# EAGLE board sensor_vi (EAGLE 5.06)
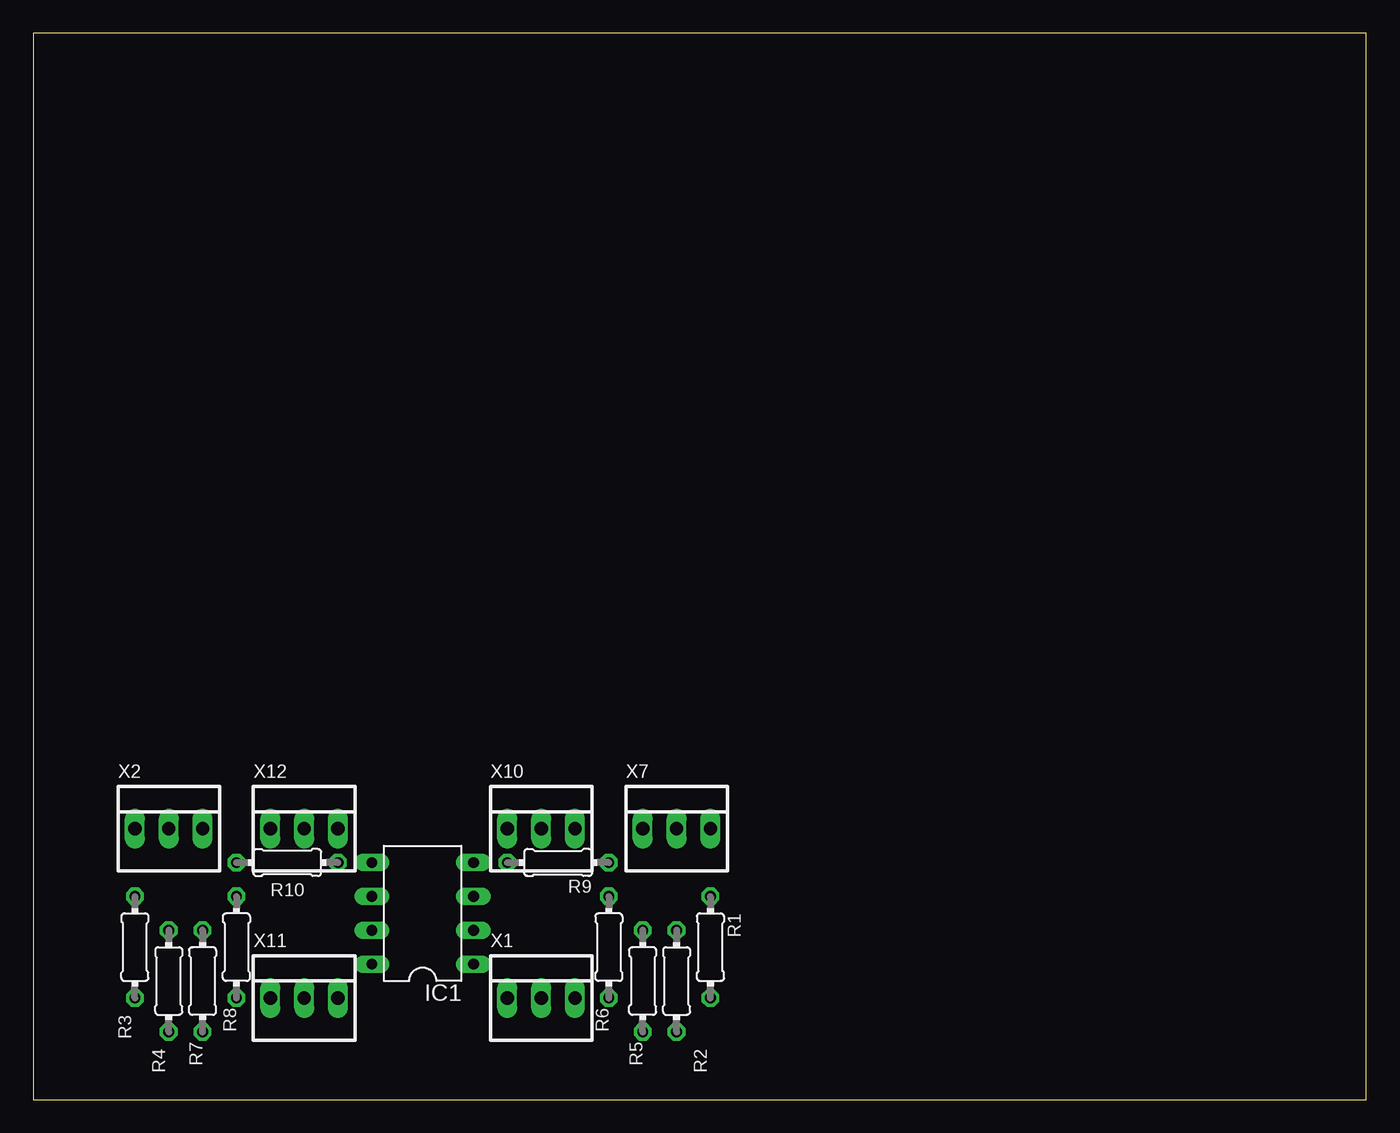
[diagram p0: board, top side]
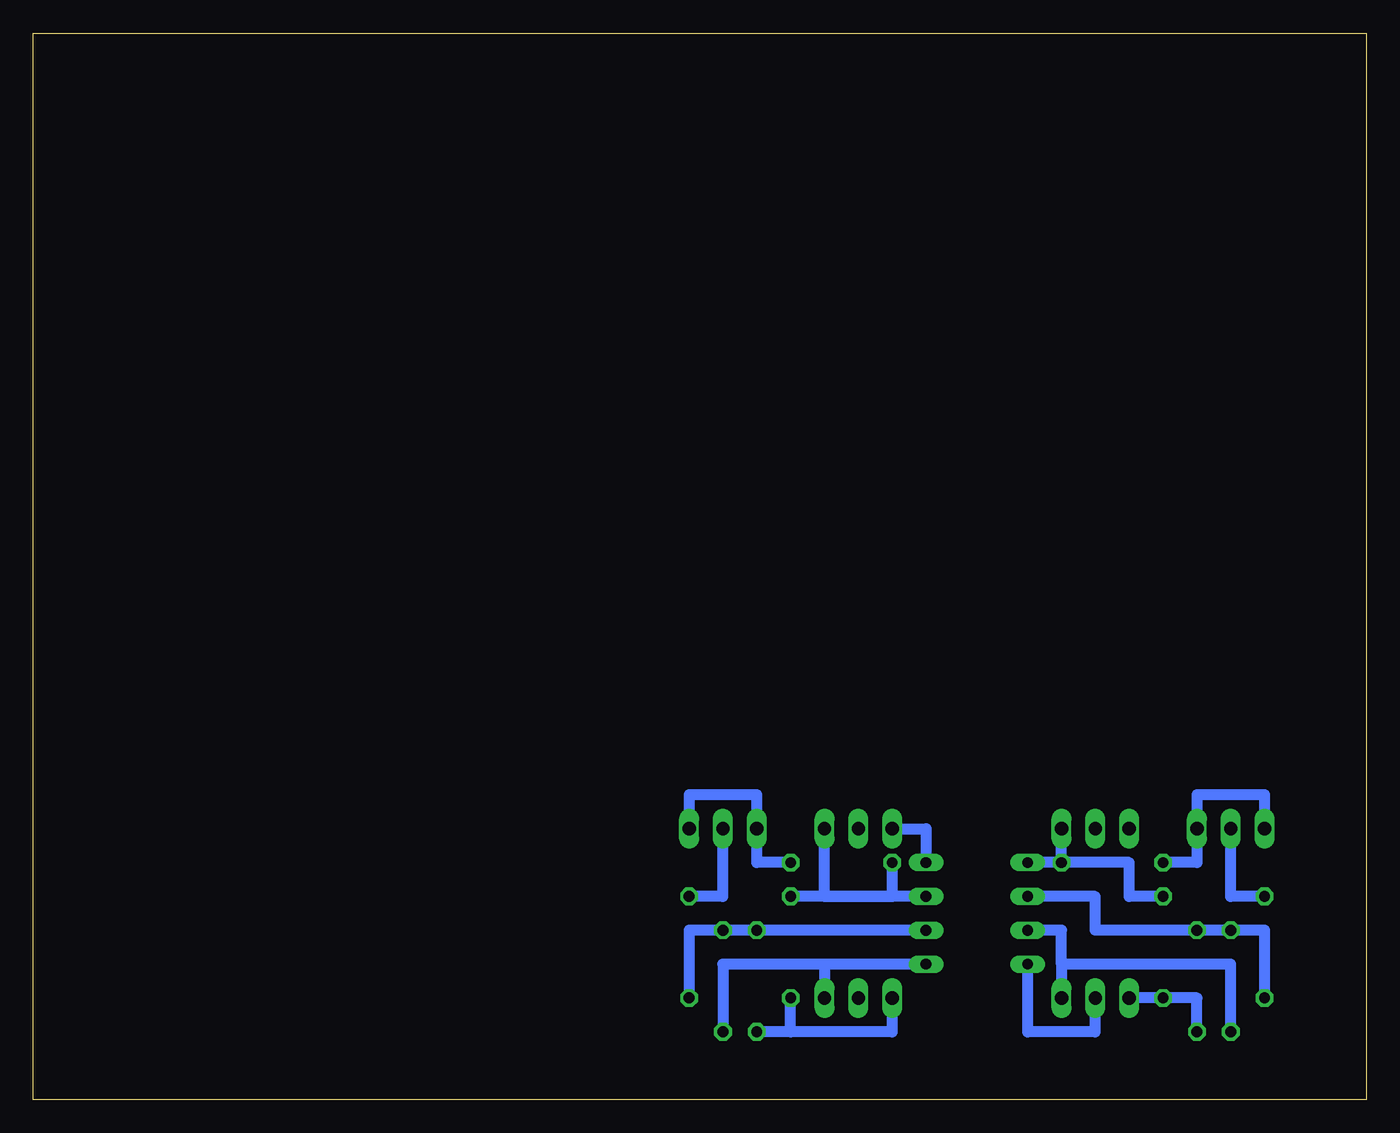
[diagram p1: board, bottom side, seen from below]

Size 100 x 80 mm. Coordinates in mm from the lower left corner, seen from the top.
Outline: 0,0 100,0 100,80 0,80 0,0
Copper layers (1*16): Top 0.035mm / dielectric 1.5mm / Bottom 0.035mm
Design rules "default": minimum track width 10mil, minimum drill 24mil, track to track 8mil, track to pad 8mil, pad to pad 8mil, via to via 8mil, smd to smd 8mil, copper to edge 40mil, drill to drill 8mil, minimum pad ring 10mil, minimum via ring 8mil, stop-mask expansion 4mil, vias tented up to drill 0mil, thermal gap 10mil

## Footprints (pad centres in the part's own frame; a part is rotated, then mirrored left to right if it is on the bottom)
DIL08 = drill 0.813 long: 1 -3.81,-3.81; 2 -1.27,-3.81; 3 1.27,-3.81; 4 3.81,-3.81; 5 3.81,3.81; 6 1.27,3.81; 7 -1.27,3.81; 8 -3.81,3.81
0204/7 = drill 0.813 octagon: 1 -3.81,0; 2 3.81,0
22-23-2031 = drill 1 long: 1 -2.54,0; 2 0,0; 3 2.54,0

## Placement (x,y rotation side)
IC1  LM358N  [DIL08]  29.21,13.97 90 top
R1  18K7  [0204/7]  50.8,11.43 270 top
R2  330K  [0204/7]  48.26,8.89 270 top
R3  33K  [0204/7]  7.62,11.43 270 top
R4  330K  [0204/7]  10.16,8.89 270 top
R5  5K6  [0204/7]  45.72,8.89 90 top
R6  5K6||330K  [0204/7]  43.18,11.43 90 top
R7  8K45  [0204/7]  12.7,8.89 90 top
R8  8K45||330K  [0204/7]  15.24,11.43 90 top
R9  18K7  [0204/7]  39.37,17.78 180 top
R10  33K  [0204/7]  19.05,17.78 0 top
X1  22-23-2031  [22-23-2031]  38.1,7.62 0 top
X2  22-23-2031  [22-23-2031]  10.16,20.32 0 top
X7  22-23-2031  [22-23-2031]  48.26,20.32 0 top
X10  22-23-2031  [22-23-2031]  38.1,20.32 0 top
X11  22-23-2031  [22-23-2031]  20.32,7.62 0 top
X12  22-23-2031  [22-23-2031]  20.32,20.32 0 top

## Library data of the parts
IC1 = linear
R1-R10 = rcl
X1 X2 X7 X10-X12 = con-molex

## Nets
GND: R7.1 R8.1 X11.1
N$1: IC1.2 R1.2 R2.1 R5.2
N$2: R9.1 X7.1 X7.3
N$3: IC1.1 R2.2 X1.3
N$4: IC1.3 R6.2 R9.2 X10.3
N$5: R1.1 X7.2
N$6: IC1.8 X11.2
N$7: IC1.7 R4.2 X11.3
N$8: IC1.6 R3.2 R4.1 R7.2
N$9: IC1.5 R8.2 R10.2 X12.3
N$10: R10.1 X2.1 X2.3
N$11: R3.1 X2.2
N$12: IC1.4 X10.1
N$14: R5.1 R6.1 X1.1

## Tracks (layer width: path | path; a pad name or v marks a point on that pad's centre or on a via)
GND
  Bottom 0.813: R7.1 12.7,7.62 R8.1 X11.1
N$1
  Bottom 0.813: IC1.2 R5.2 | R5.2 R2.1 | R2.1 50.8,12.7 R1.2 | R5.2 R2.1
N$2
  Bottom 0.813: X7.3 50.8,22.86 45.72,22.86 X7.1 45.72,17.78 R9.1
N$3
  Bottom 0.813: R2.2 48.26,10.16 40.64,10.16 | 40.64,10.16 X1.3 | IC1.1 40.64,10.16
N$4
  Bottom 0.813: IC1.3 40.64,15.24 | 40.64,15.24 R6.2 | 40.64,15.24 X10.3 | 40.64,15.24 35.56,15.24 R9.2
N$5
  Bottom 0.813: X7.2 48.26,15.24 R1.1
N$6
  Bottom 0.813: X11.2 20.32,5.08 25.4,5.08 IC1.8
N$7
  Bottom 0.813: R4.2 10.16,10.16 22.86,10.16 | 22.86,10.16 X11.3 | 22.86,10.16 22.86,12.7 IC1.7
N$8
  Bottom 0.813: IC1.6 20.32,15.24 20.32,12.7 R7.2 R4.1 7.62,12.7 R3.2
N$9
  Bottom 0.813: R10.2 IC1.5 | R10.2 X12.3 | R8.2 17.78,15.24 17.78,17.78 R10.2
N$10
  Bottom 0.813: X2.1 7.62,22.86 12.7,22.86 X2.3 12.7,17.78 R10.1
N$11
  Bottom 0.813: R3.1 10.16,15.24 X2.2
N$12
  Bottom 0.813: X10.1 33.02,20.32 IC1.4
N$14
  Bottom 0.813: 43.18,5.08 35.56,5.08 X1.1 | 43.18,5.08 R5.1 | 43.18,5.08 R6.1

## Text on the board
Document: INSTRUMENTATION | MOTORS